# Altium PCB PCB1.PcbDoc
Units mm, origin at the board's own origin, x right, y up, seen from the top; angles counter-clockwise.
Board outline 100 x 90 mm, 2 copper layers (Top Layer, Bottom Layer); 33 components, 30 nets, 91 pads, 40 vias.
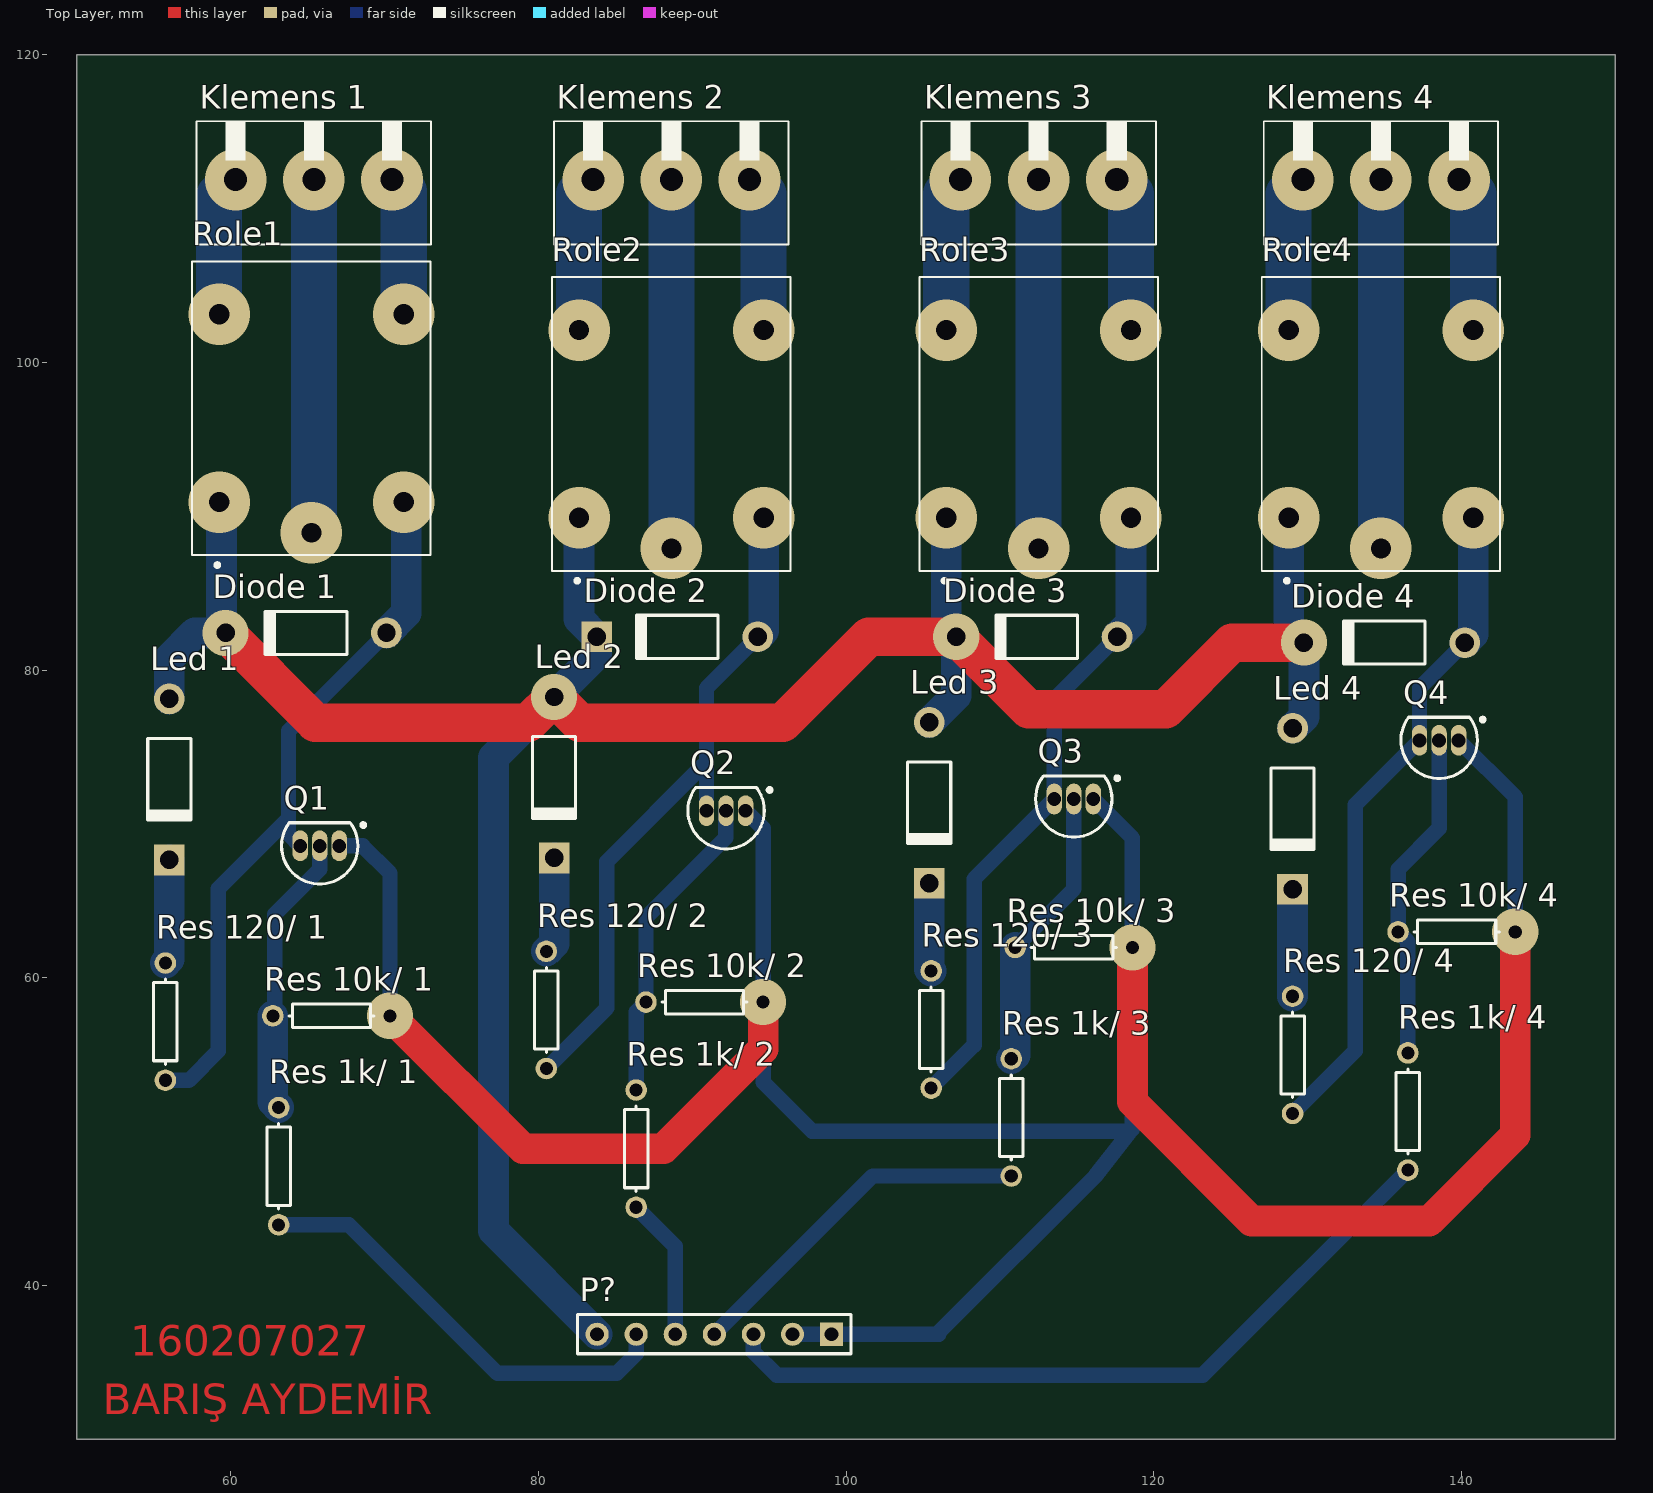
[diagram p0: Top Layer view]
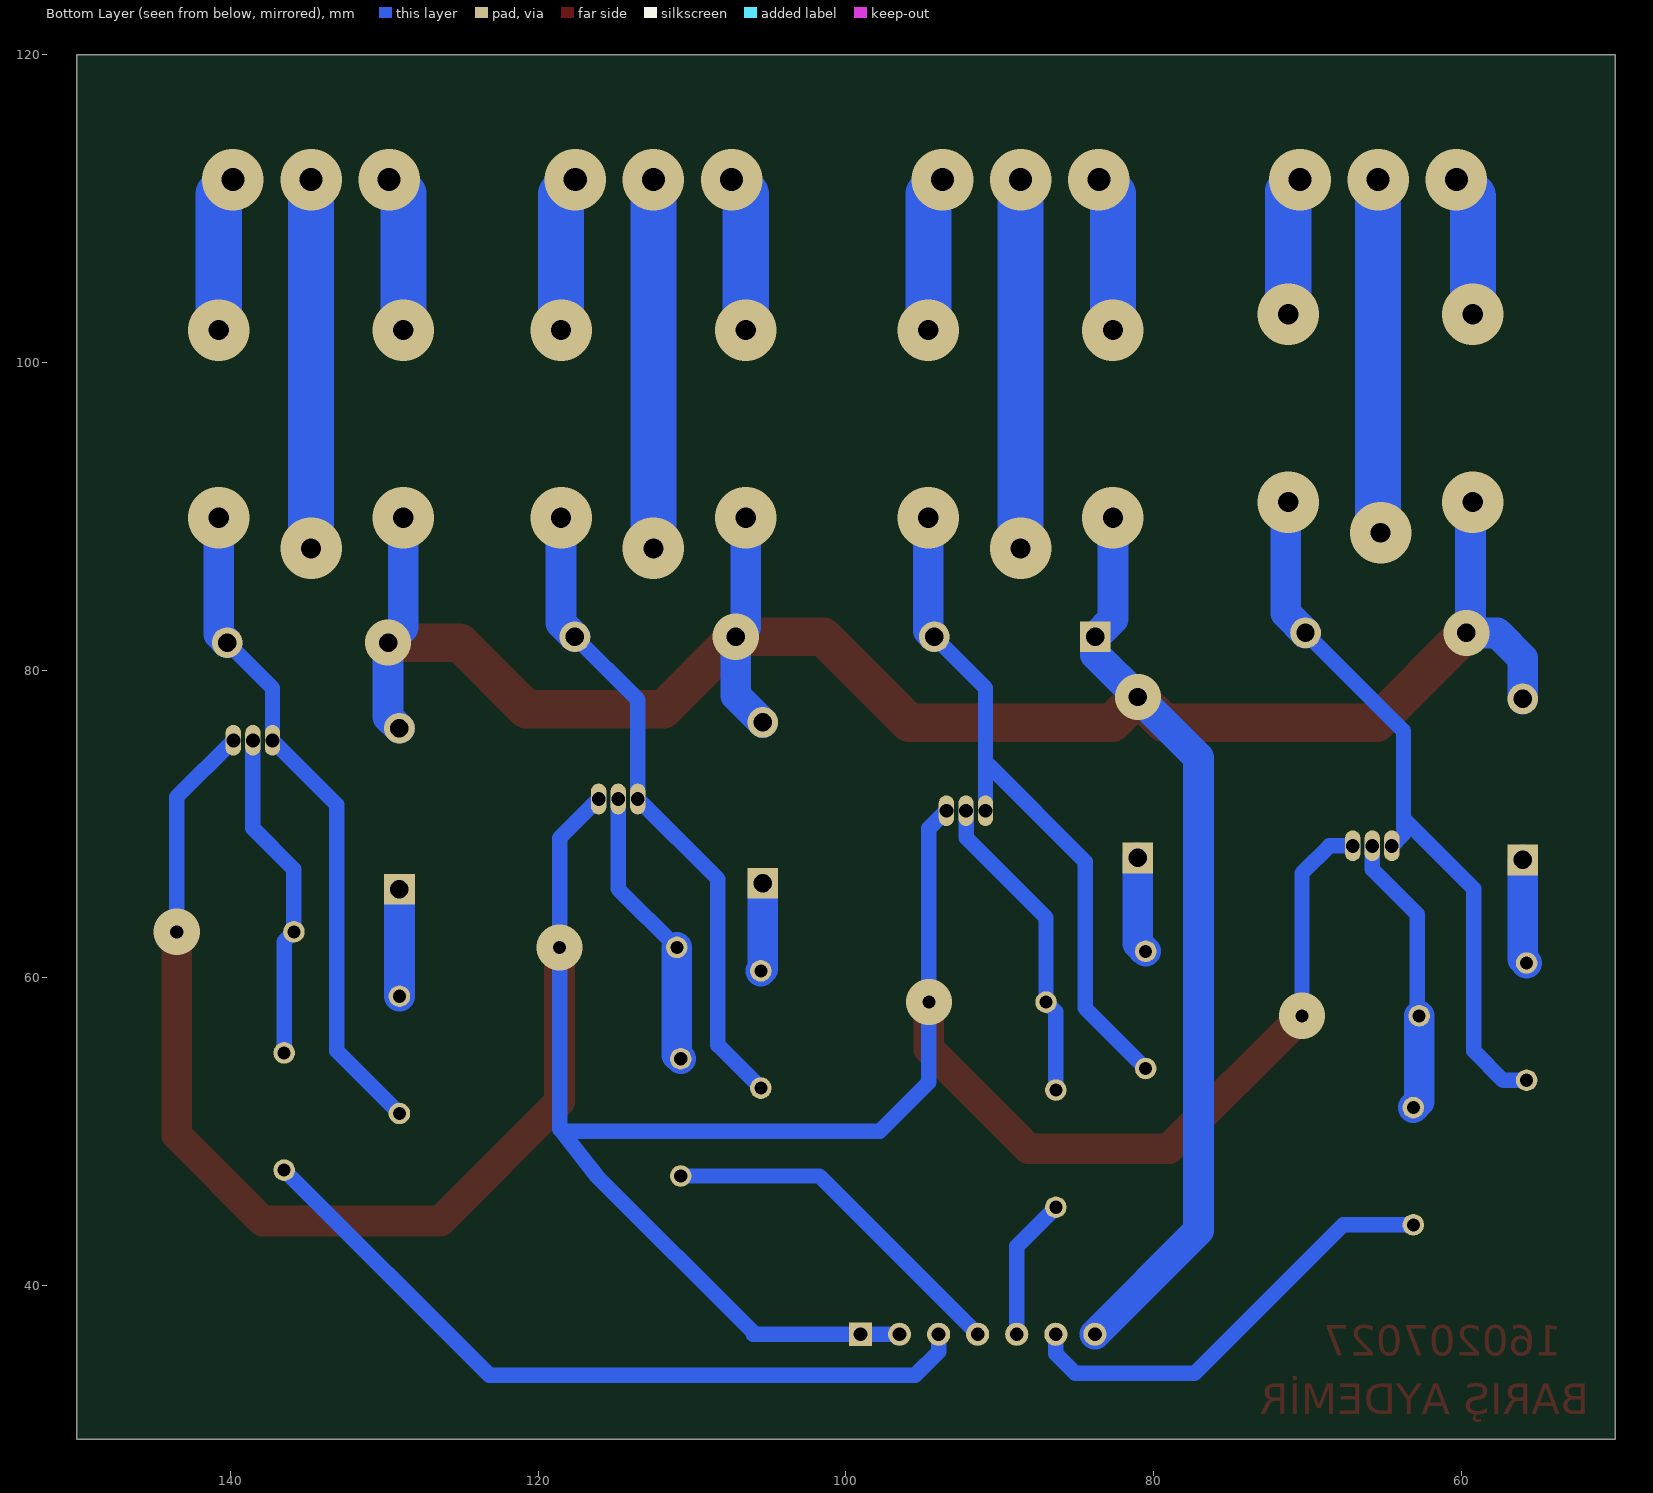
[diagram p1: Bottom Layer view, seen from below]

## Layer stack, top to bottom
Top Solder: solder mask 0.0102, Solder Resist, Dk 3.5
Top Layer: signal copper 0.0356
Dielectric 1: dielectric 0.32, FR-4, Dk 4.8
Bottom Layer: signal copper 0.0356
Bottom Solder: solder mask 0.0102, Solder Resist, Dk 3.5

## Board outline
50,30 50,120 150,120 150,30

## Design rules (kind name [scope] priority, off if disabled: settings)
Clearance [All] p1: gap=0.254 ignorepadtopadclearanceinfootprint=FALSE except(0: Arc-Hole Track-Hole SMDPad-Hole THPad-Hole Via-Hole Fill-Hole Poly-Hole Region-Hole Text-Hole)
PolygonConnect [All] p1: connectstyle=Relief reliefconductorwidth=0.254 reliefentries=4 polygonreliefangle="90 Angle" airgapwidth=0.254
RoutingVias [All] p1: holewidth=0.711 width=1.27 viastyle="Through Hole" minholewidth=0.711 minwidth=1.27 maxholewidth=0.711 maxwidth=1.27
SolderMaskExpansion [All] p1: expansion=0.102 istentingtop=FALSE
Width [All] p1: maxlimit=3 minlimit=1 preferedwidth=3
30 further rules are at their usual default settings.

## Components (designator, comment, footprint, x,y, rotation, side; value= is the part's Value field where it differs from the comment)
"Diode 1" "Diode 1N4001" DO-41 64.897,82.423 r180 top
"Diode 2" "Diode 1N4001" DO-41 89.027,82.169 r180 top
"Diode 3" "Diode 1N4001" DO-41 112.395,82.169 r180 top
"Diode 4" "Diode 1N4001" DO-41 135.001,81.788 r180 top
"Klemens 1" "1760520000" *1760520000 70.485,111.887 r180 top
"Klemens 2" "1760520000" *1760520000 93.726,111.887 r180 top
"Klemens 3" "1760520000" *1760520000 117.602,111.887 r180 top
"Klemens 4" "1760520000" *1760520000 139.858,111.887 r180 top
"Led 1" "Diode 1N4001" DO-41 56.007,72.898 r270 top
"Led 2" "Diode 1N4001" DO-41 81.026,73.025 r270 top
"Led 3" "Diode 1N4001" DO-41 105.41,71.374 r270 top
"Led 4" "Diode 1N4001" DO-41 129.032,70.993 r270 top
P? "Header 7" HDR1X7 99.06,36.83 r180 top
Q1 "2N3904" TO-92A 65.786,68.58 r90 top
Q2 "2N3904" TO-92A 92.202,70.866 r90 top
Q3 "2N3904" TO-92A 114.808,71.628 r90 top
Q4 "2N3904" TO-92A 138.557,75.438 r90 top
"Res 1k/ 1" "Res1" AXIAL-0.3 63.119,47.752 r90 top value=1K
"Res 1k/ 2" "Res1" AXIAL-0.3 86.36,48.895 r90 top value=1K
"Res 1k/ 3" "Res1" AXIAL-0.3 110.744,50.927 r90 top value=1K
"Res 1k/ 4" "Res1" AXIAL-0.3 136.525,51.308 r90 top value=1K
"Res 10k/ 1" "Res1" AXIAL-0.3 66.548,57.531 r180 top value=10K
"Res 10k/ 2" "Res1" AXIAL-0.3 90.805,58.42 r180 top value=10K
"Res 10k/ 3" "Res1" AXIAL-0.3 114.808,61.976 r180 top value=10K
"Res 10k/ 4" "Res1" AXIAL-0.3 139.7,62.992 r180 top value=10K
"Res 120/ 1" "Res1" AXIAL-0.3 55.753,57.15 r90 top value="120 ohm"
"Res 120/ 2" "Res1" AXIAL-0.3 80.518,57.912 r90 top value="120 ohm"
"Res 120/ 3" "Res1" AXIAL-0.3 105.537,56.642 r90 top value="120 ohm"
"Res 120/ 4" "Res1" AXIAL-0.3 129.032,54.991 r90 top value="120 ohm"
Role1 "SRD-05VDC-SL-C" *RELAY_SRD-05VDC-SL-C_SRD-05VDC-SL-C(Primary) 65.247,97.032 r90 top
Role2 "SRD-05VDC-SL-C" *RELAY_SRD-05VDC-SL-C_SRD-05VDC-SL-C(Primary) 88.646,96.012 r90 top
Role3 "SRD-05VDC-SL-C" *RELAY_SRD-05VDC-SL-C_SRD-05VDC-SL-C(Primary) 112.522,96.012 r90 top
Role4 "SRD-05VDC-SL-C" *RELAY_SRD-05VDC-SL-C_SRD-05VDC-SL-C(Primary) 134.778,96.012 r90 top

## Footprints (in the part's own frame and the unit in brackets; to place one, negate y for a bottom-side part, rotate by r counter-clockwise, add the part's x,y. Pads: shape width x height; smd on the part's side, far side on the other; paste and mask are expansions set on the pad)
*1760520000 [mm]
  rect 2.25x2.25 hole 1.5: 1(0,0)
  round 2.25 hole 1.5: 2(5.08,0) 3(10.16,0)
  silkscreen extent -2.54,-3.81 12.7,4.2
*RELAY_SRD-05VDC-SL-C_SRD-05VDC-SL-C(Primary) [mm]
  rect 1.98x1.98 hole 1.32: A1(-6.1,6)
  round 1.98 hole 1.32: A2(-6.1,-6) NC(6.1,6) NO(6.1,-6)
  round 1.935 hole 1.29: COM(-8.1,0)
  silkscreen extent -10.3,-7.75 9.55,7.75
AXIAL-0.3 [mm] "Axial Device, Thru-Hole; 2 Leads; 0.3 in Pin Spacing"
  round 1.4 hole 0.85: 1(-3.81,0) 2(3.81,0)
  silkscreen extent -2.77,-0.76 2.77,0.76
DO-41 [mm] "Diode, Axial; Body 5.2 x 2.7 mm (LxDia. max), Lead Dia. 0.86 mm (max)"
  round 2 hole 1.2: 1(-5.23,0)
  rect 2x2 hole 1.2: 2(5.23,0)
  silkscreen extent -2.65,-1.4 2.75,1.4
HDR1X7 [mm] "Connector; Header; 7 Position"
  rect 1.5x1.5 hole 0.9: 1(0,0)
  round 1.5 hole 0.9: 2(2.54,0) 3(5.08,0) 4(7.62,0) 5(10.16,0) 6(12.7,0) 7(15.24,0)
  silkscreen extent -1.27,-1.27 16.51,1.27
TO-92A [mm] "TO, Flat Index; 3 In-Line, Axial Leads; Body Dia. 4.5mm; Leads 0.51 x 0.48 mm (max)"
  oval 2x1 hole 0.9: 1(0,-1.27) 2(0,0) 3(0,1.27)
  silkscreen extent -2.48,-2.96 1.5,2.48, body extent -2.48,-2.5 1.5,2.5, height 6.86

## Part data
"Diode 1" "Diode 2" "Diode 3" "Diode 4" "Led 1" "Led 2" "Led 3" "Led 4": "1 Amp General Purpose Rectifier", Code_JEDEC=DO-204-AL, ComponentLink1Description="Manufacturer Link", ComponentLink1URL=http://www.fairchildsemi.com/, ComponentLink2Description=Datasheet, ComponentLink2URL=http://www.fairchildsemi.com/ds/1N%2F1N4001.pdf, DatasheetVersion=1998, LatestRevisionDate=17-Jul-2002, LatestRevisionNote="Re-released for DXP Platform.", PackageDescription="Diode, Axial; Body 5.2 x 2.7 mm (LxDia. max), Lead Dia. 0.86 mm (max)", PackageReference=DO-41, PackageVersion=Aug-1999, Published=8-Jun-2000, Publisher="Altium Limited"
"Klemens 1" "Klemens 2" "Klemens 3" "Klemens 4": "Conn Terminal Block 3 POS 5.08mm Solder ST Thru-Hole 16A", Package=None, Availability=Unavailable, MF=Weidmuller, MP=1760520000, Price=None, SnapEDA_Link=https://www.snapeda.com/parts/1760520000/Weidmuller/view-part/?ref=snap
P?: "Header, 7-Pin", LatestRevisionDate=17-Jul-2002, LatestRevisionNote="Re-released for DXP Platform.", Publisher="Altium Limited"
Q1 Q2 Q3 Q4: "NPN General Purpose Amplifier", ComponentLink1Description="Manufacturer Link", ComponentLink1URL=http://www.fairchildsemi.com/, ComponentLink2Description=Datasheet, ComponentLink2URL=http://www.fairchildsemi.com/ds/2N%2F2N3904.pdf, DatasheetVersion=1997, LatestRevisionDate=15-Jan-2003, LatestRevisionNote="PCB Footprint 'BCY-W3/D4.7' replaced", PackageDescription="TO, Flat Index; 3 In-Line, Axial Leads; Body Dia. 4.5mm; Leads 0.51 x 0.48 mm (max)", PackageReference=TO-92A, PackageVersion=Sep-1998, Published=8-Jun-2000, Publisher="Altium Limited"
"Res 1k/ 1" "Res 1k/ 2" "Res 1k/ 3" "Res 1k/ 4" "Res 10k/ 1" "Res 10k/ 2" "Res 10k/ 3" "Res 10k/ 4" "Res 120/ 1" "Res 120/ 2" "Res 120/ 3" "Res 120/ 4": "Resistor", LatestRevisionDate=17-Jul-2002, LatestRevisionNote="Re-released for DXP Platform.", PackageDescription="Axial Device, Thru-Hole; 2 Leads; 0.3 in Pin Spacing", PackageReference=AXIAL-0.3, Published=8-Jun-2000, Publisher="Altium Limited"
Role1 Role2 Role3 Role4: "5V Trigger Relay Module For Arduino And Raspberry Pi 5V Trigger Relay Module For Arduino And Raspberry Pi", Package=None, Availability=Unavailable, MF="Songle Relay", MP=SRD-05VDC-SL-C, Price=None, SnapEDA_Link=https://www.snapeda.com/parts/SRD-05VDC-SL-C/Songle%20Relay/view-part/?ref=snap

## Via types
v1: diameter 4, hole 0.711, Top Layer to Bottom Layer, 32 vias
v2: diameter 3, hole 0.711, Top Layer to Bottom Layer, 8 vias

## Nets (pads, with @x,y where several pads share a name; then routed paths per layer and width w, separated by ;. In a path a pad name is that pad's centre, name@x,y a point inside that pad or via, vN(x,y) a via of type N, cw(c..) or ccw(c..) an arc to the next point about the centre after c; other vN are vias at no path point)
GND: "Res 10k/ 1.1" "Res 10k/ 2.1" "Res 10k/ 3.1" "Res 10k/ 4.1" P?.1 P?.2 Q1.1 Q2.1 Q3.1 Q4.1 | length 208.3
  Top Layer w2: v2(70.358,57.531) 78.994,48.895 88.138,48.895 94.615,55.372 v2(94.615,58.42) ; v2(118.618,61.976) 118.618,51.943 126.365,44.196 137.922,44.196 143.51,49.784 v2(143.51,62.992)
  Bottom Layer w1: Q1.1 68.58,68.58 70.358,66.802 v2(70.358,57.531) ; Q2.1 94.615,69.723 v2(94.615,58.42) 94.615,53.213 97.79,50.038 118.491,50.038 ; P?.2 P?.1 105.918,36.83 ; 106.045,36.83 105.918,36.83 ; Q3.1 118.618,69.088 v2(118.618,61.976) 118.618,50.165 118.491,50.038 ; Q4.1 143.51,71.755 v2(143.51,62.992) ; 105.918,36.83 116.205,47.117 118.491,50.038
"NetDiode 1_1": "Diode 1.1" "Res 120/ 1.1" Q1.3 Role1.A2 | length 46
  Bottom Layer w1: 55.753,53.34 57.277,53.34 59.182,55.245 59.182,65.786 63.754,70.358 ; Q1.3 63.754,69.342 63.754,70.358 ; 70.127,82.423 63.754,76.05 63.754,70.358
  Bottom Layer w2: 70.127,82.423 71.405,83.701 v1@71.405,89.912
  other v1: 71.247,90.932
"NetDiode 2_1": "Diode 2.1" "Res 120/ 2.1" Q2.3 Role2.A2 | length 44.7
  Bottom Layer w1: 80.518,54.102 84.455,58.039 84.455,67.564 90.678,73.787 90.932,73.787 ; Q2.3 90.932,73.787 ; 94.257,82.169 90.932,78.844 90.932,73.787
  Bottom Layer w2: 94.257,82.169 94.646,82.558 v1(94.646,89.912)
"NetDiode 3_1": "Diode 3.1" "Res 120/ 3.1" Q3.3 Role3.A2 | length 42.5
  Bottom Layer w1: 105.537,52.832 108.331,55.626 108.331,66.421 Q3.3 113.538,78.082 117.625,82.169
  Bottom Layer w2: 117.625,82.169 118.522,83.066 v1(118.522,89.912)
"NetDiode 4_1": "Diode 4.1" "Res 120/ 4.1" Q4.3 Role4.A2 | length 43.6
  Bottom Layer w1: 129.032,51.181 133.096,55.245 133.096,71.247 Q4.3 137.287,78.844 140.231,81.788
  Bottom Layer w2: 140.231,81.788 140.778,82.335 v1(140.778,89.912)
"NetKlemens 1_1": "Klemens 1.1" Role1.NO | length 9.1
  Bottom Layer w3: v1(70.485,111.887) 71.247,111.125 v1(71.247,103.132)
"NetKlemens 1_2": "Klemens 1.2" Role1.COM | length 23
  Bottom Layer w2: v1(65.247,88.932) Role1.COM@65.405,89.09
  Bottom Layer w3: Role1.COM@65.405,89.09 v1(65.405,111.887)
"NetKlemens 1_3": "Klemens 1.3" Role1.NC | length 9.2
  Bottom Layer w3: v1(59.247,103.132) 59.247,110.809 v1(60.325,111.887)
"NetKlemens 2_1": "Klemens 2.1" Role2.NO | length 10.2
  Bottom Layer w3: v1(93.726,111.887) 94.646,110.967 v1(94.646,102.112)
"NetKlemens 2_2": "Klemens 2.2" Role2.COM | length 24
  Bottom Layer w3: v1(88.646,87.912) v1(88.646,111.887)
"NetKlemens 2_3": "Klemens 2.3" Role2.NC | length 10.2
  Bottom Layer w3: v1(82.646,102.112) 82.646,110.967 v1(83.566,111.887)
"NetKlemens 3_1": "Klemens 3.1" Role3.NO | length 10.2
  Bottom Layer w3: v1(117.602,111.887) 118.522,110.967 v1(118.522,102.112)
"NetKlemens 3_2": "Klemens 3.2" Role3.COM | length 24
  Bottom Layer w3: v1(112.522,87.912) v1(112.522,111.887)
"NetKlemens 3_3": "Klemens 3.3" Role3.NC | length 10.2
  Bottom Layer w3: v1(106.522,102.112) 106.522,110.967 v1(107.442,111.887)
"NetKlemens 4_1": "Klemens 4.1" Role4.NO | length 10.2
  Bottom Layer w3: v1(139.858,111.887) 140.778,110.967 v1(140.778,102.112)
"NetKlemens 4_2": "Klemens 4.2" Role4.COM | length 24
  Bottom Layer w3: v1(134.778,87.912) v1(134.778,111.887)
"NetKlemens 4_3": "Klemens 4.3" Role4.NC | length 10.2
  Bottom Layer w3: v1(128.778,102.112) 128.778,110.967 v1(129.698,111.887)
"NetLed 1_2": "Led 1.2" "Res 120/ 1.2" | length 6.8
  Bottom Layer w2: 55.753,60.96 56.007,61.214 56.007,67.668
"NetLed 2_2": "Led 2.2" "Res 120/ 2.2" | length 6.3
  Bottom Layer w2: 80.518,61.722 81.026,62.23 81.026,67.795
"NetLed 3_2": "Led 3.2" "Res 120/ 3.2" | length 5.7
  Bottom Layer w2: 105.41,66.144 105.41,60.579 105.537,60.452
"NetLed 4_2": "Led 4.2" "Res 120/ 4.2" | length 7
  Bottom Layer w2: 129.032,58.801 129.032,65.763
NetP?_3: "Res 1k/ 4.1" P?.3 | length 49.8
  Bottom Layer w1: P?.3 93.98,35.687 95.504,34.163 123.19,34.163 136.525,47.498
NetP?_4: "Res 1k/ 3.1" P?.4 | length 23.6
  Bottom Layer w1: P?.4 101.727,47.117 110.744,47.117
NetP?_5: "Res 1k/ 2.1" P?.5 | length 9.3
  Bottom Layer w1: 86.36,45.085 88.9,42.545 P?.5
NetP?_6: "Res 1k/ 1.1" P?.6 | length 29
  Bottom Layer w1: 63.119,43.942 67.691,43.942 77.343,34.29 85.09,34.29 86.36,35.56 P?.6
NetQ1_2: "Res 1k/ 1.2" "Res 10k/ 1.2" Q1.2 | length 18.4
  Bottom Layer w1: 62.738,57.531 62.865,57.658 62.865,64.135 65.786,67.056 Q1.2
  Bottom Layer w2: 62.738,57.531 62.738,51.943 63.119,51.562
NetQ2_2: "Res 1k/ 2.2" "Res 10k/ 2.2" Q2.2 | length 20.6
  Bottom Layer w1: 86.36,52.705 86.36,57.785 86.995,58.42 86.995,63.921 92.186,69.112 92.186,70.85 Q2.2
NetQ3_2: "Res 1k/ 3.2" "Res 10k/ 3.2" Q3.2 | length 18.6
  Bottom Layer w1: 110.998,61.976 114.808,65.786 Q3.2
  Bottom Layer w2: 110.744,54.737 110.998,54.991 110.998,61.976
NetQ4_2: "Res 1k/ 4.2" "Res 10k/ 4.2" Q4.2 | length 21.7
  Bottom Layer w1: 136.525,55.118 136.525,62.357 135.89,62.992 135.89,67.056 138.557,69.723 Q4.2
VCC: "Diode 1.2" "Diode 2.2" "Diode 3.2" "Diode 4.2" "Led 1.1" "Led 2.1" "Led 3.1" "Led 4.1" P?.7 Role1.A1 Role2.A1 Role3.A1 Role4.A1 | length 182.4
  Top Layer w2.5: v2(59.667,82.423) 65.509,76.581 79.352,76.581 v2(81.026,78.255) 82.7,76.581 95.885,76.581 101.473,82.169 v2(107.165,82.169) 111.864,77.47 120.777,77.47 125.095,81.788 v2(129.771,81.788)
  Bottom Layer w2: 56.007,78.128 56.007,80.772 57.658,82.423 v2(59.667,82.423) 59.405,82.685 v1@59.405,89.912 ; v1(82.646,89.912) 82.646,83.32 83.797,82.169 83.797,81.026 v2(81.026,78.255) 77.089,74.318 77.089,43.561 P?.7 ; 105.41,76.604 107.165,78.359 v2(107.165,82.169) 106.522,82.812 v1(106.522,89.912) ; v1(128.778,89.912) 128.778,82.781 v2(129.771,81.788) 129.771,76.962 129.032,76.223
  other v1: 59.247,90.932

## Other copper
Top Layer:
  text "160207027" at 53.467,35.433 h2
  text "BARIŞ AYDEMİR" at 51.689,31.623 h2

## Silkscreen, mask and mechanical layers (free items; w line width, h text height)
Mechanical 1:
  the board outline again, w1